# Altium PCB DRC0010G.PcbDoc
Units mm, origin at the board's own origin, x right, y up, seen from the top; angles counter-clockwise.
Board outline 11.18 x 13.72 mm, 2 copper layers (Top Layer, Bottom Layer); 3 components, 11 nets, 21 pads, 0 vias.
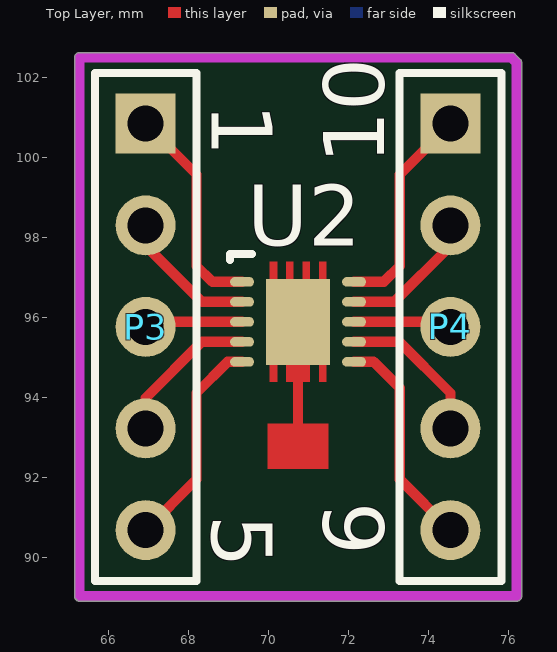
[diagram p0: Top Layer view]
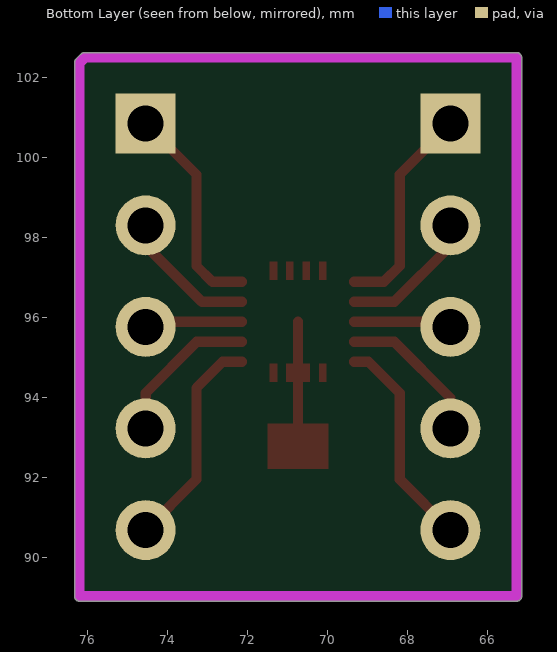
[diagram p1: Bottom Layer view, seen from below]

## Layer stack, top to bottom
Top Solder: solder mask 0.0102, Solder Resist, Dk 3.5
Top Layer: signal copper 0.0356
Dielectric 1: dielectric 0.32, FR-4, Dk 4.8
Bottom Layer: signal copper 0.0356
Bottom Solder: solder mask 0.0102, Solder Resist, Dk 3.5

## Board outline
65.278,88.9 cw(c65.278,89.027) 65.151,89.027 65.151,102.489 cw(c65.278,102.489) 65.278,102.616 76.073,102.616 cw(c76.073,102.489) 76.164,102.579 76.163,102.579 76.29,102.452 76.29,102.453 cw(c76.2,102.362) 76.327,102.362 76.327,89.027 cw(c76.2,89.027) 76.2,88.9

## Design rules (kind name [scope] priority, off if disabled: settings)
Clearance [All] p1 off: gap=0.254 ignorepadtopadclearanceinfootprint=FALSE except(0: Arc-Hole Track-Hole SMDPad-Hole THPad-Hole Via-Hole Fill-Hole Poly-Hole Region-Hole Text-Hole)
ComponentClearance [All] p1 off: gap=0.254 collisioncheckmode=3 verticalgap=0.254 showdistances=FALSE
PolygonConnect [All] p1: connectstyle=Relief reliefconductorwidth=0.254 reliefentries=4 polygonreliefangle="90 Angle" airgapwidth=0.254
RoutingVias [All] p1: holewidth=0.711 width=1.27 viastyle="Through Hole" minholewidth=0.711 minwidth=1.27 maxholewidth=0.711 maxwidth=1.27
SolderMaskExpansion [All] p1: expansion=0.102
Width [All] p1: maxlimit=0.254 minlimit=0.254 preferedwidth=0.254
29 further rules are at their usual default settings.

## Components (designator, comment, footprint, x,y, rotation, side; value= is the part's Value field where it differs from the comment)
P3 "" HDR1X5 66.929,100.838 r270 top
P4 "" HDR1X5 74.549,100.838 r270 top
U2 "" DRC0010G 70.739,95.885 r0 top

## Footprints (in the part's own frame and the unit in brackets; to place one, negate y for a bottom-side part, rotate by r counter-clockwise, add the part's x,y. Pads: shape width x height; smd on the part's side, far side on the other; paste and mask are expansions set on the pad)
DRC0010G [mm]
  oval 0.6x0.24 smd paste-0.102 mask+0.051: 1(-1.4,1) 2(-1.4,0.5) 3(-1.4,0) 4(-1.4,-0.5) 5(-1.4,-1) 6(1.4,-1) 7(1.4,-0.5) 8(1.4,0) 9(1.4,0.5) 10(1.4,1)
  rect 1.6x2.15 smd paste-0.825 mask+0.051: 11(0,0)
  Top Layer region: 0.705,1.05 0.705,1.5 0.525,1.5 0.525,1.05
  Top Layer region: 0.295,1.05 0.295,1.5 0.115,1.5 0.115,1.05
  Top Layer region: -0.115,1.05 -0.115,1.5 -0.295,1.5 -0.295,1.05
  Top Layer region: -0.525,1.05 -0.525,1.5 -0.705,1.5 -0.705,1.05
  Top Layer region: -0.525,-1.5 -0.525,-1.05 -0.705,-1.05 -0.705,-1.5
  Top Layer region: -0.115,-1.5 -0.115,-1.05 -0.295,-1.05 -0.295,-1.5
  Top Layer region: 0.295,-1.5 0.295,-1.05 0.115,-1.05 0.115,-1.5
  Top Layer region: 0.705,-1.5 0.705,-1.05 0.525,-1.05 0.525,-1.5
  silkscreen extent -1.7,1.54 -1.15,1.7
HDR1X5 [mm] "Connector; Header; 5 Position"
  rect 1.5x1.5 hole 0.9: 1(0,0)
  round 1.5 hole 0.9: 2(2.54,0) 3(5.08,0) 4(7.62,0) 5(10.16,0)
  silkscreen extent -1.27,-1.27 11.43,1.27

## Nets (pads, with @x,y where several pads share a name; then routed paths per layer and width w, separated by ;. In a path a pad name is that pad's centre, name@x,y a point inside that pad or via, vN(x,y) a via of type N, cw(c..) or ccw(c..) an arc to the next point about the centre after c; other vN are vias at no path point)
U2-1: P3.1 U2.1 | length 5.4
  Top Layer w0.254: P3.1 68.199,99.568 68.199,97.282 68.596,96.885 U2.1
U2-2: P3.2 U2.2 | length 3.5
  Top Layer w0.254: P3.2 66.929,97.79 68.334,96.385 U2.2
U2-3: P3.3 U2.3 | length 2.5
  Top Layer w0.254: P3.3 67.056,95.885 U2.3
U2-4: P3.4 U2.4 | length 3.8
  Top Layer w0.254: P3.4 66.929,93.98 68.334,95.385 U2.4
U2-5: P3.5 U2.5 | length 5.4
  Top Layer w0.254: P3.5 68.199,91.948 68.199,94.107 68.977,94.885 U2.5
U2-6: P4.5 U2.6 | length 5.5
  Top Layer w0.254: U2.6 72.628,94.885 73.279,94.234 73.279,91.948 P4.5
U2-7: P4.4 U2.7 | length 3.8
  Top Layer w0.254: U2.7 73.271,95.385 74.549,94.107 P4.4
U2-8: P4.3 U2.8 | length 2.5
  Top Layer w0.254: U2.8 74.422,95.885 P4.3
U2-9: P4.2 U2.9 | length 3.5
  Top Layer w0.254: U2.9 73.144,96.385 74.549,97.79 P4.2
U2-10: P4.1 U2.10 | length 5.4
  Top Layer w0.254: U2.10 72.882,96.885 73.279,97.282 73.279,99.568 P4.1
U2-PAD: U2.11 | length 3.2
  Top Layer w0.254: 70.739,92.71 U2.11

## Keep-outs
Keep-Out Layer:
  lines w0.254: 65.278,89.027 65.278,102.489 76.073,102.489 76.2,102.362 76.2,89.027 65.278,89.027

## Other copper
Top Layer:
  rectangle net U2-PAD: 69.977,92.202 71.501,93.345

## Silkscreen, mask and mechanical layers (free items; w line width, h text height)
Top Overlay:
  text "1" at 68.58,101.346 h1.52 r270
  text "10" at 72.898,99.822 h1.52 r90
  text "5" at 68.58,91.059 h1.52 r270
  text "6" at 72.898,90.043 h1.52 r90
Top Paste:
  rectangle: 70.104,92.329 71.374,93.218